# Altium PCB PowerBoard.PcbDoc
Units mil, origin at the board's own origin, x right, y up, seen from the top; angles counter-clockwise.
Board outline 3937.01 x 1929.14 mil, 2 copper layers (Top Layer, Bottom Layer); 4 components, 6 nets, 22 pads, 0 vias.
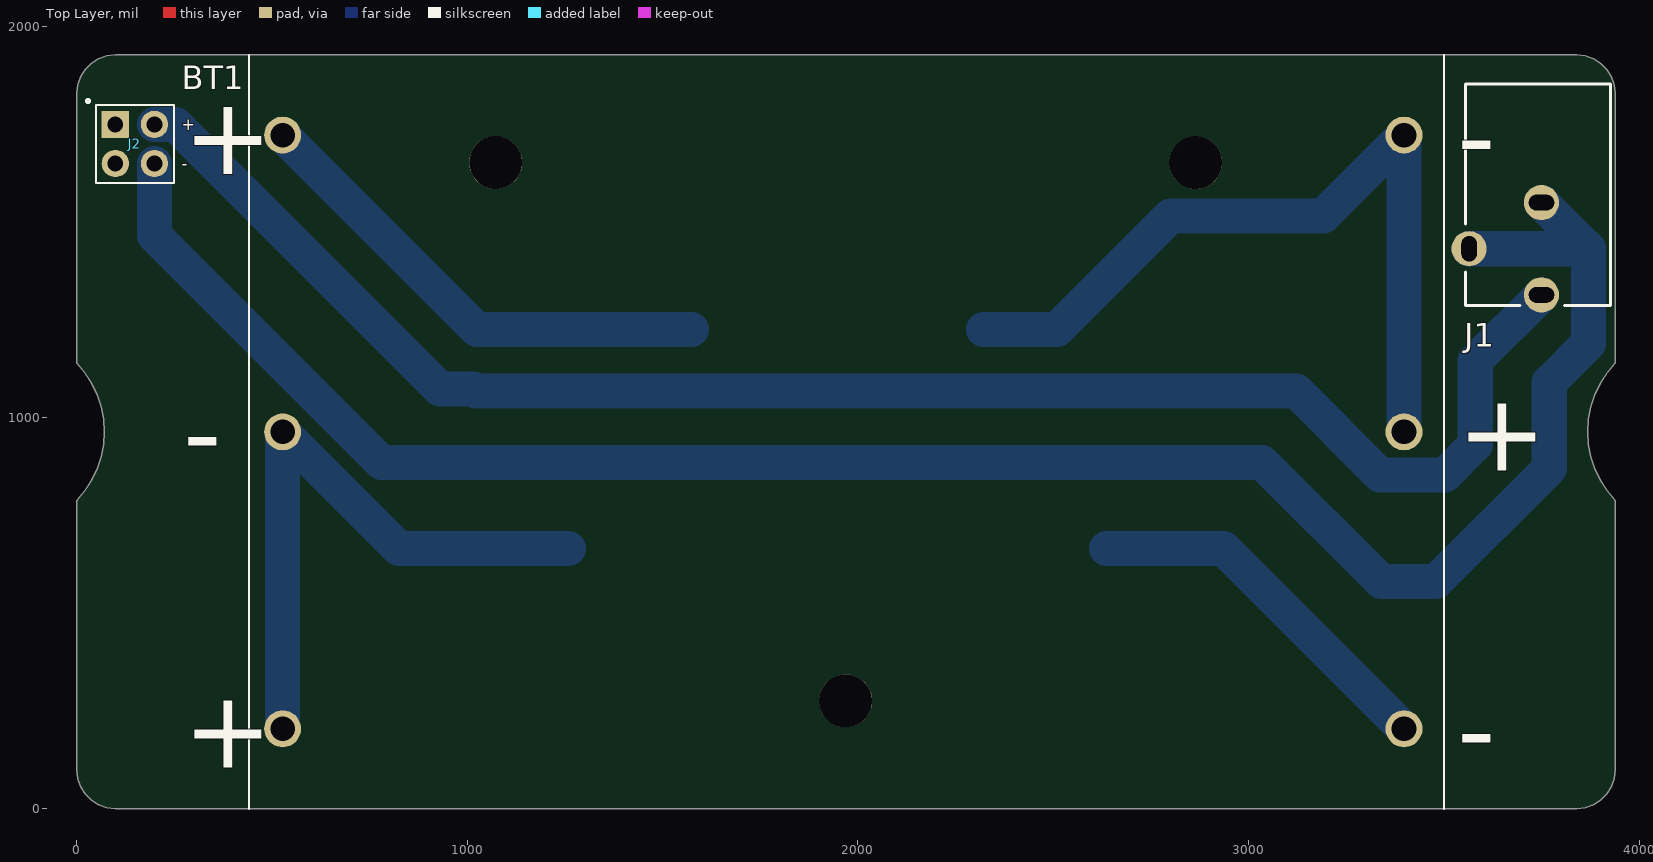
[diagram p0: Top Layer view]
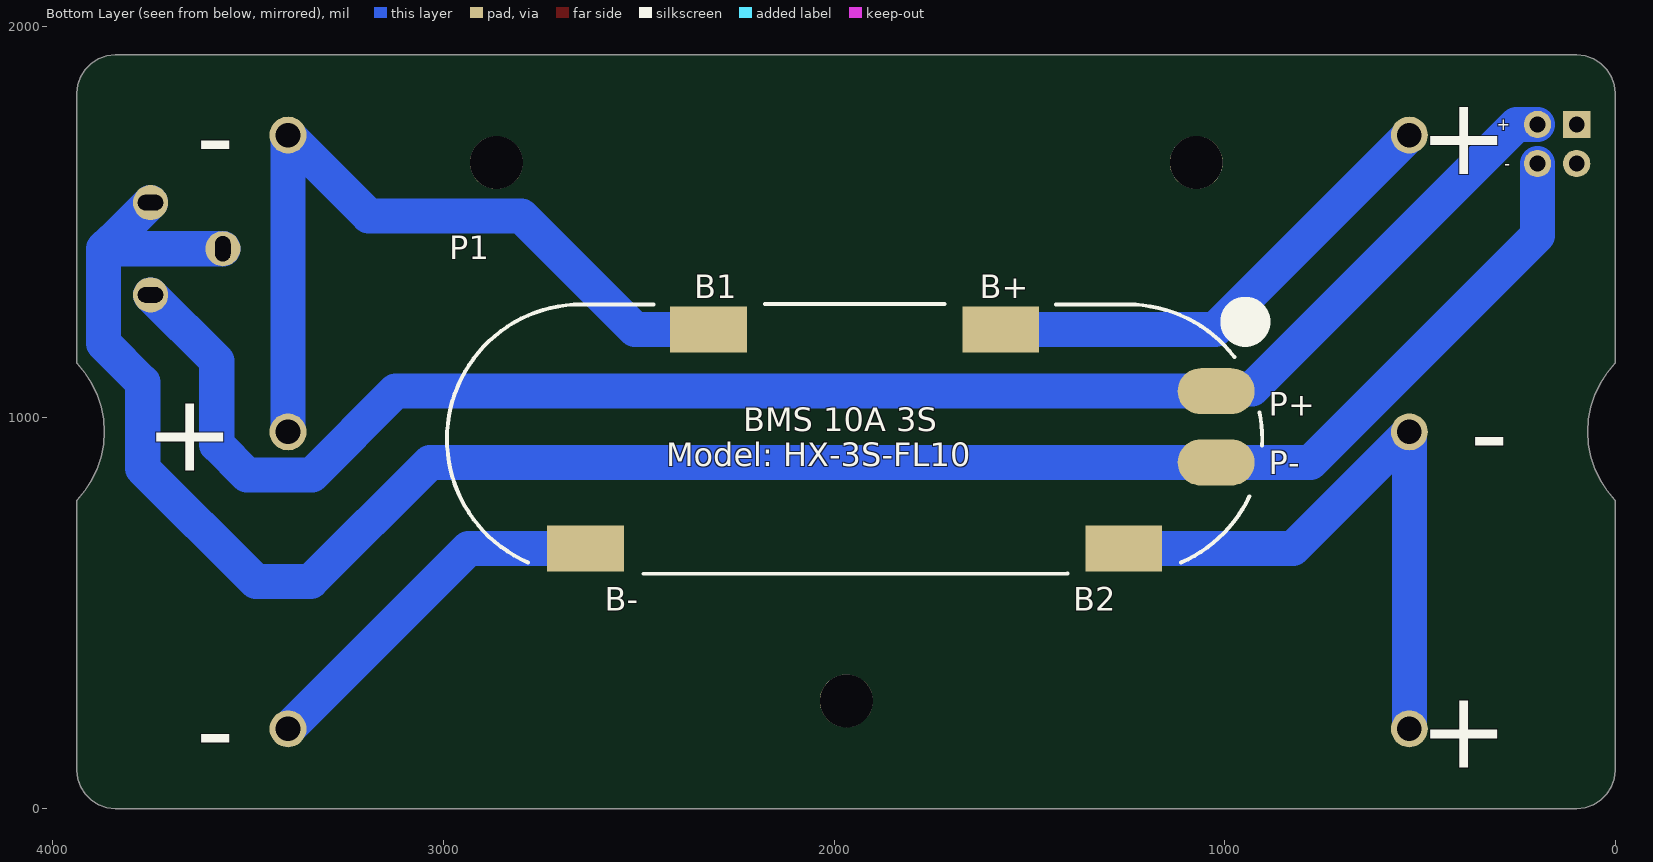
[diagram p1: Bottom Layer view, seen from below]

## Layer stack, top to bottom
Top Solder: solder mask 0.4, Solder Resist, Dk 3.5
Top Layer: signal copper 1.4
Dielectric 1: dielectric 12.6, FR-4, Dk 4.8
Bottom Layer: signal copper 1.4
Bottom Solder: solder mask 0.4, Solder Resist, Dk 3.5

## Board outline
3938.52,97.34 3938.52,788.07 3917.78,812.76 3900.34,839.89 3886.47,869 3876.41,899.63 3870.3,931.3 3868.25,963.48 3870.3,995.66 3876.41,1027.33 3886.47,1057.96 3900.34,1087.07 3917.78,1114.2 3938.52,1138.89 3938.52,1829.62 3936.05,1851.52 3928.77,1872.33 3917.04,1890.99 3901.46,1906.57 3882.8,1918.3 3861.99,1925.58 3840.09,1928.05 99.94,1928.05 78.03,1925.58 57.23,1918.3 38.57,1906.57 22.98,1890.99 11.26,1872.32 3.98,1851.52 1.51,1829.62 1.51,1138.89 22.25,1114.19 39.69,1087.07 53.56,1057.96 63.62,1027.32 69.73,995.66 71.77,963.48 69.73,931.3 63.62,899.63 53.56,869 39.69,839.89 22.25,812.76 1.51,788.07 1.51,97.34 3.98,75.43 11.26,54.63 22.98,35.97 38.57,20.38 57.23,8.66 78.03,1.38 99.94,-1.09 3840.09,-1.09 3862,1.38 3882.8,8.66 3901.46,20.39 3917.05,35.97 3928.77,54.63 3936.05,75.44

## Design rules (kind name [scope] priority, off if disabled: settings)
Clearance [All] p1: gap=10 ignorepadtopadclearanceinfootprint=FALSE except(0: Arc-Hole Track-Hole SMDPad-Hole THPad-Hole Via-Hole Fill-Hole Poly-Hole Region-Hole Text-Hole)
PolygonConnect [All] p1: connectstyle=Relief reliefconductorwidth=10 reliefentries=4 polygonreliefangle="90 Angle" airgapwidth=10
RoutingVias [All] p1: holewidth=28 width=50 viastyle="Through Hole" minholewidth=28 minwidth=50 maxholewidth=28 maxwidth=50
SolderMaskExpansion [All] p1: expansion=4 istentingtop=FALSE
Width [All] p1: maxlimit=90 minlimit=10 preferedwidth=90
30 further rules are at their usual default settings.

## Components (designator, comment, footprint, x,y, rotation, side; value= is the part's Value field where it differs from the comment)
BT1 "BK-18650-PC6" BAT_BK-18650-PC6 1971,963 r0 top
J1 "PJ-102AH" "CUI PJ-102AH" 3750,1569.68 r0 top
J2 "PIN HEADER 2x1" M20-9950245 150,1700 r0 top
P1 "BMS3S10A" BMS 1948,945 r180 bottom

## Footprints (in the part's own frame and the unit in brackets; to place one, negate y for a bottom-side part, rotate by r counter-clockwise, add the part's x,y. Pads: shape width x height; smd on the part's side, far side on the other; paste and mask are expansions set on the pad)
BAT_BK-18650-PC6 [mm]
  round 2.4 hole 1.6: 1+(-36.65,19.3) 1-(36.25,19.3) 2+(36.25,0) 2-(-36.65,0) 3+(-36.65,-19.3) 3-(36.25,-19.3)
  silkscreen extent -38.85,-24.51 38.85,24.51, body extent -38.86,-29.68 38.79,29.72, height 21.7
BMS [mm]
  rect 5x3 smd: 1(9.5,7.112) 2(-9.5,7.112) 3(-17.5,-7.112) 4(17.5,-7.112)
  oval 5x3 smd: 5(23.5,-1.524) 6(23.5,3.11)
  silkscreen extent -26.5,-8.76 26.5,8.76
"CUI PJ-102AH" [mm] "DC Barrel Jack W/ Switch 2.0x5.5"
  round 2.286 hole 1 slot 1.651 at 0 deg: 1(0,-6.5) 2(0,-0.5)
  round 2.286 hole 1 slot 1.651 at 90 deg: 3(-4.7,-3.5)
  silkscreen extent -4.92,-7.2 4.47,7.2, body extent -4.92,-7.2 4.47,7.2, height 11
M20-9950245 [mil] "M20-9950245 Pin Connector"
  rect 70x70 hole 40: 1(-50,50)
  round 70 hole 40: 2(-50,-50) 3(50,50) 4(50,-50)
  silkscreen extent -124,-100 100,114, body extent -100,-62 100,548, height 202

## Part data
BT1: "Battery Holder _Open_ 18650 3 Cell PC Pin", Package=None, Availability=Unavailable, MF=MPD, MP=BK-18650-PC6, Price=None, SnapEDA_Link=https://www.snapeda.com/parts/BK-18650-PC6/MPD/view-part/4480464/?ref=snap
J1: "CONN PWR JACK 2X5.5MM SOLDER", Current Rating (Amps)=5A, Manufacturer="CUI Devices", Material Flammability Rating="UL94 V-0", Supplier Part Number 1=CP-102AH-ND, Voltage - Rated=24VDC, Actual Diameter="0.079\" (2.00mm ID), 0.256\" (6.50mm OD)", ComponentLink1Description=Datasheet, ComponentLink1URL=https://www.cuidevices.com/product/resource/digikeypdf/pj-102ah.pdf, ComponentLink2Description="DigiKey Link", ComponentLink2URL=//digikey.com/product-detail/en/cui-devices/PJ-102AH/CP-102AH-ND/408448, Connector Type=Jack, Gender=Male, Industry Recognized Mating Diameter="2.00mm ID (0.079\"), 5.50mm OD (0.217\")", Internal Switch(s)="Single Switch, Normally Closed", LastUpdated="12/16/2019 19:01:27", Lifecycle Status=0, Mating Length/Depth="0.354\" (9.00mm)", Minimum Order=1, Mounting Type="Through Hole, Right Angle", Number of Positions/Contacts="2 Conductors, 3 Contacts", Packaging=Tray, Part Number=PJ-102AH, Part Status=Active, Price=0.76, Series=-, Shielding=Unshielded, Supplier 1=DigiKey, Termination=Solder
J2: library part M20-9950245, "M20-9950245 Pin Connector", ComponentLink1Description=Datasheet, ComponentLink1URL=https://www.snapeda.com/parts/M20-9950245/Harwin/datasheet/
P1: library part BMS

## Free pads (board coordinates)
  round 135.43 hole 135.43: 1(1073.56,1652.46) 1(1969.23,274.5) 1(2864.9,1652.46)

## Nets (pads, with @x,y where several pads share a name; then routed paths per layer and width w, separated by ;. In a path a pad name is that pad's centre, name@x,y a point inside that pad or via, vN(x,y) a via of type N, cw(c..) or ccw(c..) an arc to the next point about the centre after c; other vN are vias at no path point)
+11V1: J1.1 J2.3 P1.6 | length 4237.6
  Bottom Layer w90: J2.3 254,1750 931.18,1072.82 1017.43,1072.82 P1.6 3122.56,1067.44 3337.01,852.99 3502.99,852.99 3580.38,930.38 3580.38,1144.16 J1.1
Bat_+3V7: BT1.2- BT1.3+ P1.4 | length 1614.2
  Bottom Layer w90: BT1.3+ BT1.2- 826.09,665 P1.4
Bat_+7V4: BT1.1- BT1.2+ P1.2 | length 2042.2
  Bottom Layer w90: P1.2 2510,1225 2801,1516 3191.32,1516 BT1.1- BT1.2+
Bat_+11V1: BT1.1+ P1.1 | length 1252.1
  Bottom Layer w90: BT1.1+ 1025.93,1225 P1.1
Bat_GND: BT1.3- P1.3 | length 952.5
  Bottom Layer w90: P1.3 2936.32,665 BT1.3-
GND: J1.2 J1.3 J2.4 P1.5 | length 5318.4
  Bottom Layer w90: J2.4 200,1466 781,885 3035,885 3340,580 3480,580 3770,870 3770,1090 3870,1190 3870,1431.89 ; J1.3 3870,1431.89 ; J1.2 3845.91,1454.09 3847.8,1454.09 3870,1431.89
pads on no net: J2.1 J2.2

## Text inside footprints (layer, text, board x,y; h text height)
BT1: Bottom Overlay "+" at 3534.35,863.03 h200; Bottom Overlay "+" at 274.35,103.03 h200; Bottom Overlay "-" at 274.35,863.03 h200; Bottom Overlay "-" at 3534.35,1623.03 h200; Bottom Overlay "-" at 3534.35,103.03 h200; Bottom Overlay "+" at 274.35,1623.03 h200; Top Overlay "+" at 274.35,1623.03 h200; Top Overlay "+" at 274.35,103.03 h200; Top Overlay "-" at 274.35,863.03 h200; Top Overlay "-" at 3534.35,1623.03 h200; Top Overlay "-" at 3534.35,103.03 h200; Top Overlay "+" at 3534.35,863.03 h200
J2: Bottom Overlay "+" at 270,1735 h30; Bottom Overlay "-" at 270,1635 h30; Top Overlay "+" at 270,1735 h30; Top Overlay "-" at 270,1635 h30
P1: Bottom Overlay "Model: HX-3S-FL10" at 2430.51,875.44 h60; Bottom Overlay "BMS 10A 3S" at 2232.91,965.01 h60; Bottom Overlay "P+" at 888,1005 h60; Bottom Overlay "P-" at 888,855 h60; Bottom Overlay "B+" at 1628,1305 h60; Bottom Overlay "B1" at 2358,1305 h60; Bottom Overlay "B2" at 1388,505 h60; Bottom Overlay "B-" at 2588,505 h60